# EAGLE board Sparkfun_RS232_Panel_v15 (EAGLE 7.2.0), part 1 of 3
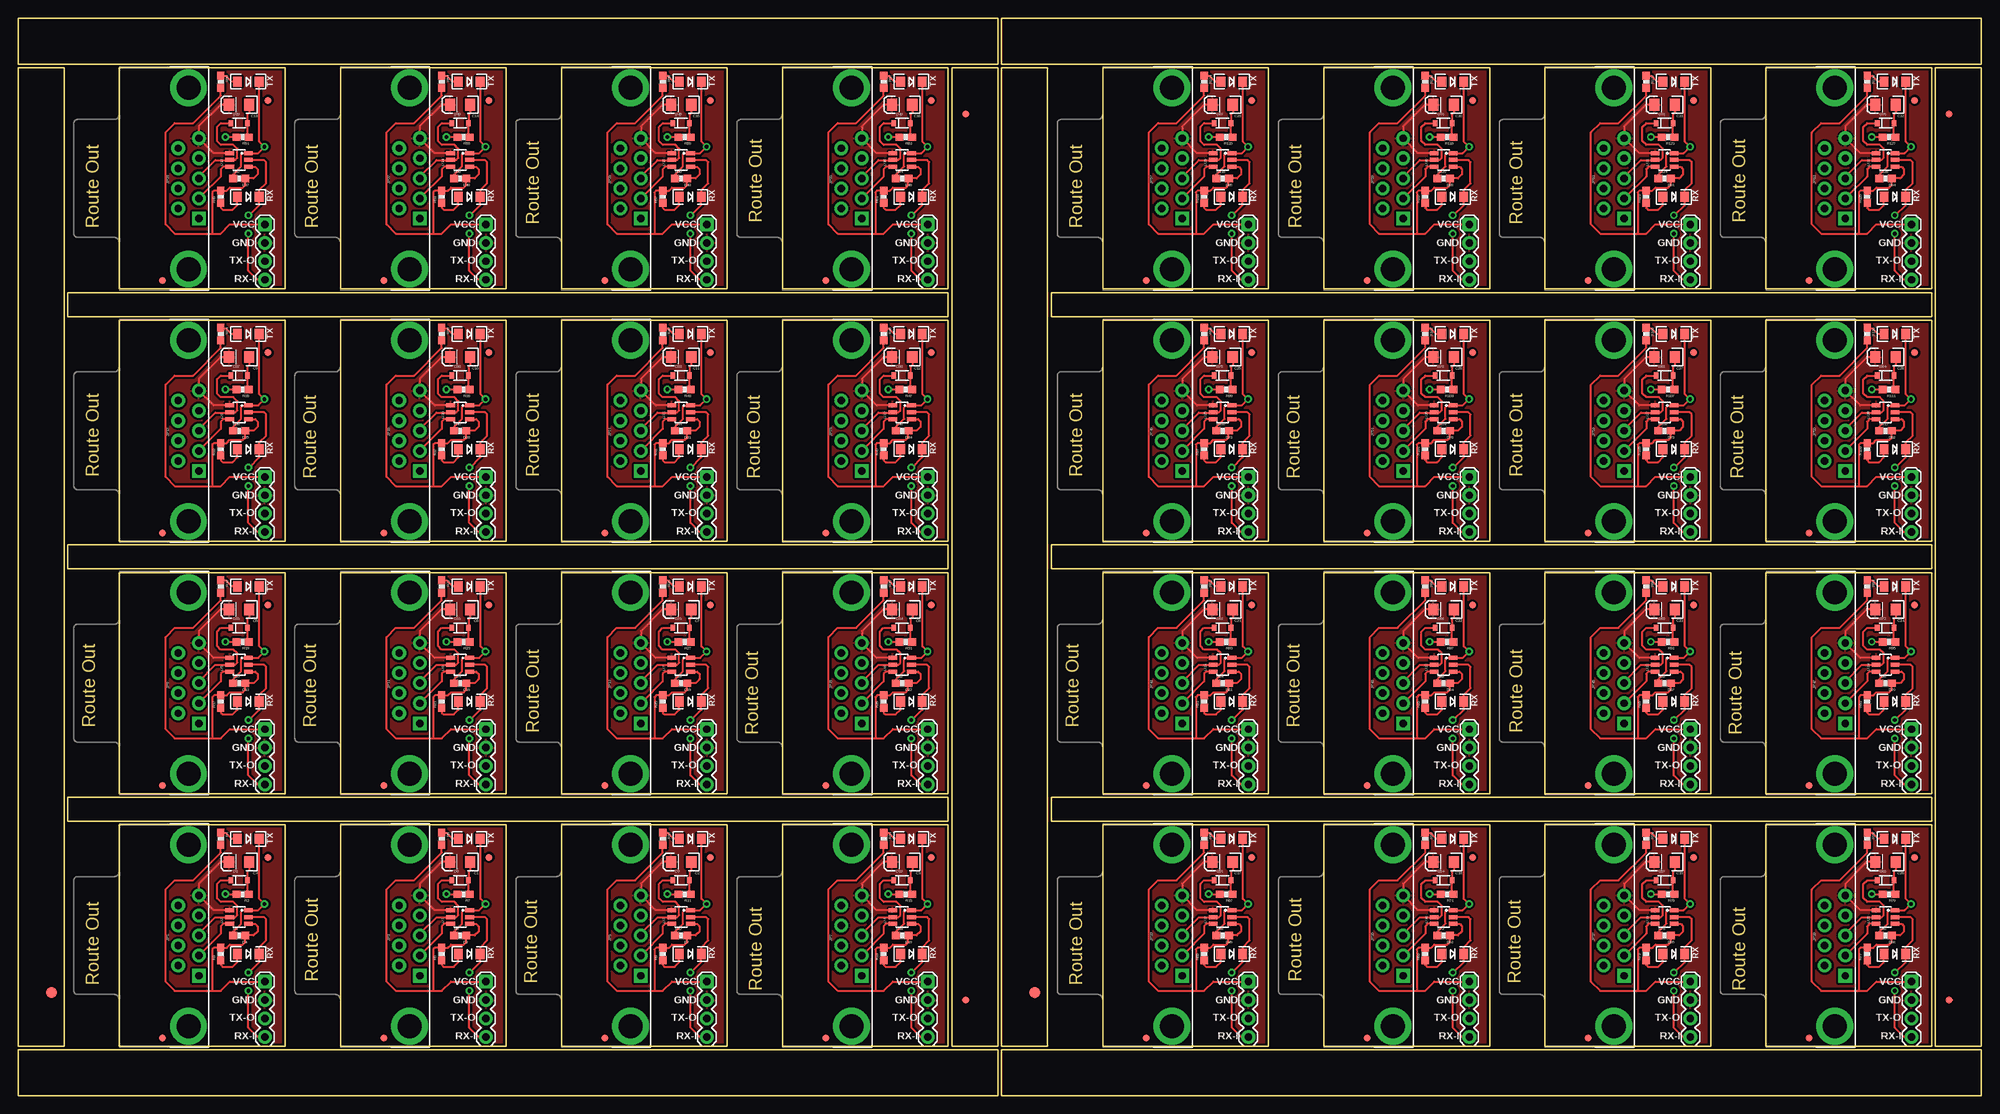
[diagram p0: board, top side]
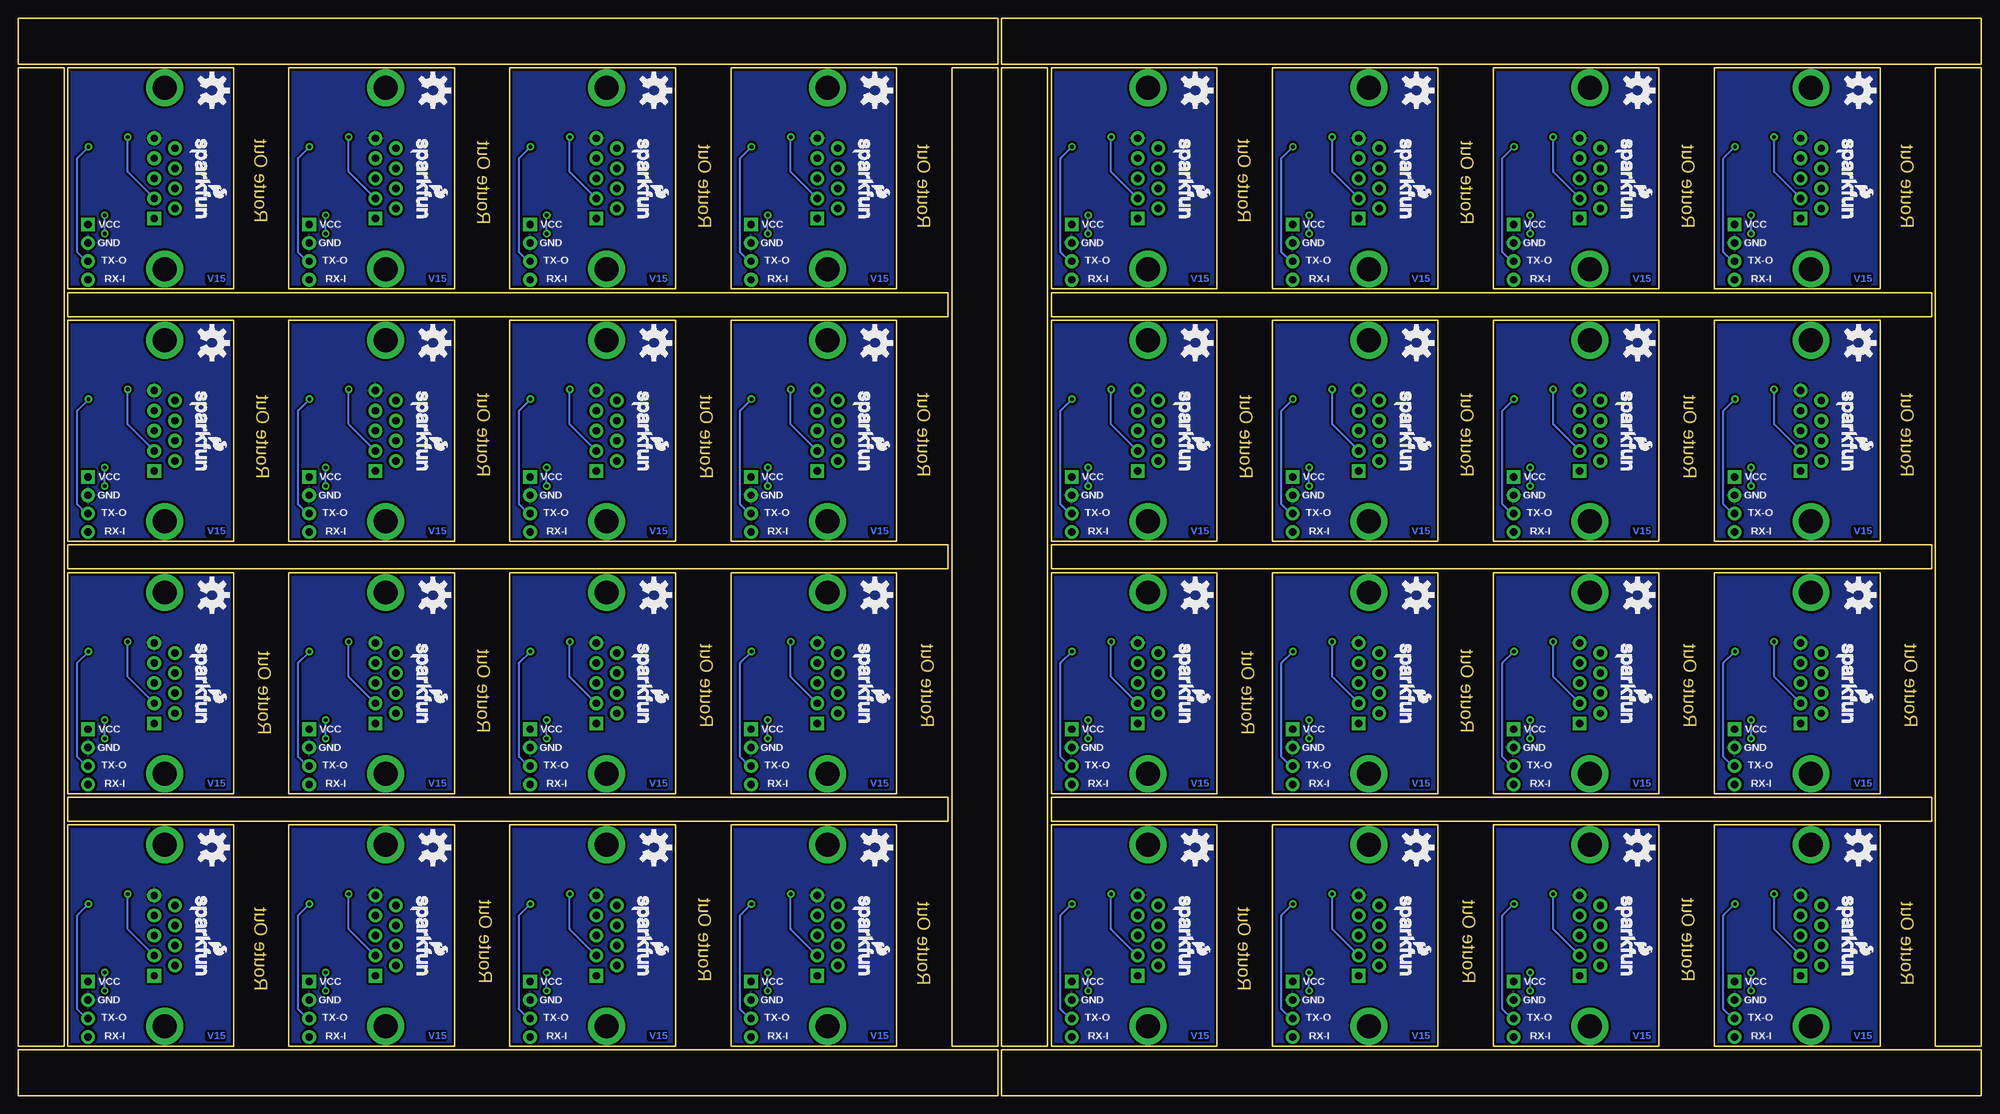
[diagram p1: board, bottom side, seen from below]

Size 270.76 x 148.59 mm. Coordinates in mm from the lower left corner, seen from the top.
Outline: 196 segments
Copper layers (1*16): Top 0.035mm / dielectric 1.5mm / Bottom 0.035mm
Design rules "SparkFun-2-layer": minimum track width 7mil, minimum drill 15mil, track to track 8mil, track to pad 8mil, pad to pad 8mil, via to via 8mil, smd to smd 8mil, copper to edge 8mil, drill to drill 8mil, minimum pad ring 12mil, minimum via ring 10mil, stop-mask expansion 4mil, vias tented up to drill 20mil, thermal gap 10mil
Net classes: 0 default: width 0.203 mm; 1 power: width 0.203 mm

## Footprints (pad centres in the part's own frame; a part is rotated, then mirrored left to right if it is on the bottom)
EIA3216 = smd 1.4 x 1.6: A 1.4,0; C -1.4,0
SOD-323 = smd 0.63 x 0.83: A 1.15,0; C -1.15,0
LED-1206 = smd 1.2 x 1.4: A -1.5,0; C 1.5,0
FIDUCIAL-1X2 = smd 1 x 1: 1 0,0
FIDUCIAL-1.5X3 = smd 1.5 x 1.5: 1 0,0
DB9 = drill 1.016 pad 1.88 square: 1 -5.54,-1.42 | drill 1.016 pad 1.88: 2 -2.77,-1.42; 3 0,-1.42; 4 2.77,-1.42; 5 5.54,-1.42; 6 -4.15,1.42; 7 -1.38,1.42; 8 1.38,1.42; 9 4.15,1.42 | drill 3.302 pad 5.08: G1 -12.5,0; G2 12.5,0
1X04 = drill 1.016 pad 1.88 square: 1 0,0 | drill 1.016 pad 1.88: 2 2.54,0; 3 5.08,0; 4 7.62,0
0603-RES = smd 1.1 x 1: 1 -0.85,0; 2 0.85,0
SOT23-6 = smd 0.55 x 1.2: 1 0.95,-1.3; 2 0,-1.3; 3 -0.95,-1.3; 4 -0.95,1.3; 5 0,1.3; 6 0.95,1.3

## Placement (x,y rotation side)
C1  10uF  [EIA3216]  60.96,32.26 180 top
C2  10uF  [EIA3216]  91.44,32.26 180 top
C3  10uF  [EIA3216]  121.92,32.26 180 top
C4  10uF  [EIA3216]  30.48,32.26 180 top
C5  10uF  [EIA3216]  30.48,67.06 180 top
C6  10uF  [EIA3216]  60.96,67.06 180 top
C7  10uF  [EIA3216]  91.44,67.06 180 top
C8  10uF  [EIA3216]  121.92,67.06 180 top
C9  10uF  [EIA3216]  30.48,101.85 180 top
C10  10uF  [EIA3216]  60.96,101.85 180 top
C11  10uF  [EIA3216]  91.44,101.85 180 top
C12  10uF  [EIA3216]  121.92,101.85 180 top
C13  10uF  [EIA3216]  30.48,136.65 180 top
C14  10uF  [EIA3216]  60.96,136.65 180 top
C15  10uF  [EIA3216]  91.44,136.65 180 top
C16  10uF  [EIA3216]  121.92,136.65 180 top
C17  10uF  [EIA3216]  166.12,32.26 180 top
C18  10uF  [EIA3216]  196.6,32.26 180 top
C19  10uF  [EIA3216]  227.08,32.26 180 top
C20  10uF  [EIA3216]  257.56,32.26 180 top
C21  10uF  [EIA3216]  166.12,67.06 180 top
C22  10uF  [EIA3216]  196.6,67.06 180 top
C23  10uF  [EIA3216]  227.08,67.06 180 top
C24  10uF  [EIA3216]  257.56,67.06 180 top
C25  10uF  [EIA3216]  166.12,101.85 180 top
C26  10uF  [EIA3216]  196.6,101.85 180 top
C27  10uF  [EIA3216]  227.08,101.85 180 top
C28  10uF  [EIA3216]  257.56,101.85 180 top
C29  10uF  [EIA3216]  166.12,136.65 180 top
C30  10uF  [EIA3216]  196.6,136.65 180 top
C31  10uF  [EIA3216]  227.08,136.65 180 top
C32  10uF  [EIA3216]  257.56,136.65 180 top
D1  BAS16  [SOD-323]  30.48,29.72 0 top
D2  Red  [LED-1206]  62.23,19.56 0 top
D3  Grn  [LED-1206]  62.23,35.43 0 top
D4  Red  [LED-1206]  31.75,19.56 0 top
D5  Grn  [LED-1206]  31.75,35.43 0 top
D6  BAS16  [SOD-323]  60.96,29.72 0 top
D7  Red  [LED-1206]  92.71,19.56 0 top
D8  Grn  [LED-1206]  92.71,35.43 0 top
D9  BAS16  [SOD-323]  91.44,29.72 0 top
D10  Red  [LED-1206]  123.19,19.56 0 top
D11  Grn  [LED-1206]  123.19,35.43 0 top
D12  BAS16  [SOD-323]  121.92,29.72 0 top
D13  Red  [LED-1206]  31.75,54.36 0 top
D14  Grn  [LED-1206]  31.75,70.23 0 top
D15  BAS16  [SOD-323]  30.48,64.52 0 top
D16  Red  [LED-1206]  62.23,54.36 0 top
D17  Grn  [LED-1206]  62.23,70.23 0 top
D18  BAS16  [SOD-323]  60.96,64.52 0 top
D19  Red  [LED-1206]  92.71,54.36 0 top
D20  Grn  [LED-1206]  92.71,70.23 0 top
D21  BAS16  [SOD-323]  91.44,64.52 0 top
D22  Red  [LED-1206]  123.19,54.36 0 top
D23  Grn  [LED-1206]  123.19,70.23 0 top
D24  BAS16  [SOD-323]  121.92,64.52 0 top
D25  Red  [LED-1206]  31.75,89.15 0 top
D26  Grn  [LED-1206]  31.75,105.03 0 top
D27  BAS16  [SOD-323]  30.48,99.31 0 top
D28  Red  [LED-1206]  62.23,89.15 0 top
D29  Grn  [LED-1206]  62.23,105.03 0 top
D30  BAS16  [SOD-323]  60.96,99.31 0 top
D31  Red  [LED-1206]  92.71,89.15 0 top
D32  Grn  [LED-1206]  92.71,105.03 0 top
D33  BAS16  [SOD-323]  91.44,99.31 0 top
D34  Red  [LED-1206]  123.19,89.15 0 top
D35  Grn  [LED-1206]  123.19,105.03 0 top
D36  BAS16  [SOD-323]  121.92,99.31 0 top
D37  Red  [LED-1206]  31.75,123.95 0 top
D38  Grn  [LED-1206]  31.75,139.83 0 top
D39  BAS16  [SOD-323]  30.48,134.11 0 top
D40  Red  [LED-1206]  62.23,123.95 0 top
D41  Grn  [LED-1206]  62.23,139.83 0 top
D42  BAS16  [SOD-323]  60.96,134.11 0 top
D43  Red  [LED-1206]  92.71,123.95 0 top
D44  Grn  [LED-1206]  92.71,139.83 0 top
D45  BAS16  [SOD-323]  91.44,134.11 0 top
D46  Red  [LED-1206]  123.19,123.95 0 top
D47  Grn  [LED-1206]  123.19,139.83 0 top
D48  BAS16  [SOD-323]  121.92,134.11 0 top
D49  Red  [LED-1206]  167.39,19.56 0 top
D50  Grn  [LED-1206]  167.39,35.43 0 top
D51  BAS16  [SOD-323]  166.12,29.72 0 top
D52  Red  [LED-1206]  197.87,19.56 0 top
D53  Grn  [LED-1206]  197.87,35.43 0 top
D54  BAS16  [SOD-323]  196.6,29.72 0 top
D55  Red  [LED-1206]  228.35,19.56 0 top
D56  Grn  [LED-1206]  228.35,35.43 0 top
D57  BAS16  [SOD-323]  227.08,29.72 0 top
D58  Red  [LED-1206]  258.83,19.56 0 top
D59  Grn  [LED-1206]  258.83,35.43 0 top
D60  BAS16  [SOD-323]  257.56,29.72 0 top
D61  Red  [LED-1206]  167.39,54.36 0 top
D62  Grn  [LED-1206]  167.39,70.23 0 top
D63  BAS16  [SOD-323]  166.12,64.52 0 top
D64  Red  [LED-1206]  197.87,54.36 0 top
D65  Grn  [LED-1206]  197.87,70.23 0 top
D66  BAS16  [SOD-323]  196.6,64.52 0 top
D67  Red  [LED-1206]  228.35,54.36 0 top
D68  Grn  [LED-1206]  228.35,70.23 0 top
D69  BAS16  [SOD-323]  227.08,64.52 0 top
D70  Red  [LED-1206]  258.83,54.36 0 top
D71  Grn  [LED-1206]  258.83,70.23 0 top
D72  BAS16  [SOD-323]  257.56,64.52 0 top
D73  Red  [LED-1206]  167.39,89.15 0 top
D74  Grn  [LED-1206]  167.39,105.03 0 top
D75  BAS16  [SOD-323]  166.12,99.31 0 top
D76  Red  [LED-1206]  197.87,89.15 0 top
D77  Grn  [LED-1206]  197.87,105.03 0 top
D78  BAS16  [SOD-323]  196.6,99.31 0 top
D79  Red  [LED-1206]  228.35,89.15 0 top
D80  Grn  [LED-1206]  228.35,105.03 0 top
D81  BAS16  [SOD-323]  227.08,99.31 0 top
D82  Red  [LED-1206]  258.83,89.15 0 top
D83  Grn  [LED-1206]  258.83,105.03 0 top
D84  BAS16  [SOD-323]  257.56,99.31 0 top
D85  Red  [LED-1206]  167.39,123.95 0 top
D86  Grn  [LED-1206]  167.39,139.83 0 top
D87  BAS16  [SOD-323]  166.12,134.11 0 top
D88  Red  [LED-1206]  197.87,123.95 0 top
D89  Grn  [LED-1206]  197.87,139.83 0 top
D90  BAS16  [SOD-323]  196.6,134.11 0 top
D91  Red  [LED-1206]  228.35,123.95 0 top
D92  Grn  [LED-1206]  228.35,139.83 0 top
D93  BAS16  [SOD-323]  227.08,134.11 0 top
D94  Red  [LED-1206]  258.83,123.95 0 top
D95  Grn  [LED-1206]  258.83,139.83 0 top
D96  BAS16  [SOD-323]  257.56,134.11 0 top
E$1  FIDUCIAL1X2  [FIDUCIAL-1X2]  19.94,8 0 top
E$2  FIDUCIAL1X2  [FIDUCIAL-1X2]  34.48,32.87 0 top
E$3  FIDUCIAL1X2  [FIDUCIAL-1X2]  50.42,8 0 top
E$4  FIDUCIAL1X2  [FIDUCIAL-1X2]  64.96,32.87 0 top
E$5  FIDUCIAL1X2  [FIDUCIAL-1X2]  80.9,8 0 top
E$6  FIDUCIAL1X2  [FIDUCIAL-1X2]  95.44,32.87 0 top
E$7  FIDUCIAL1X2  [FIDUCIAL-1X2]  111.38,8 0 top
E$8  FIDUCIAL1X2  [FIDUCIAL-1X2]  125.92,32.87 0 top
E$9  FIDUCIAL1X2  [FIDUCIAL-1X2]  19.94,42.8 0 top
E$10  FIDUCIAL1X2  [FIDUCIAL-1X2]  34.48,67.66 0 top
E$11  FIDUCIAL1X2  [FIDUCIAL-1X2]  50.42,42.8 0 top
E$12  FIDUCIAL1X2  [FIDUCIAL-1X2]  64.96,67.66 0 top
E$13  FIDUCIAL1X2  [FIDUCIAL-1X2]  80.9,42.8 0 top
E$14  FIDUCIAL1X2  [FIDUCIAL-1X2]  95.44,67.66 0 top
E$15  FIDUCIAL1X2  [FIDUCIAL-1X2]  111.38,42.8 0 top
E$16  FIDUCIAL1X2  [FIDUCIAL-1X2]  125.92,67.66 0 top
E$17  FIDUCIAL1X2  [FIDUCIAL-1X2]  19.94,77.6 0 top
E$18  FIDUCIAL1X2  [FIDUCIAL-1X2]  34.48,102.46 0 top
E$19  FIDUCIAL1X2  [FIDUCIAL-1X2]  50.42,77.6 0 top
E$20  FIDUCIAL1X2  [FIDUCIAL-1X2]  64.96,102.46 0 top
E$21  FIDUCIAL1X2  [FIDUCIAL-1X2]  80.9,77.6 0 top
E$22  FIDUCIAL1X2  [FIDUCIAL-1X2]  95.44,102.46 0 top
E$23  FIDUCIAL1X2  [FIDUCIAL-1X2]  111.38,77.6 0 top
E$24  FIDUCIAL1X2  [FIDUCIAL-1X2]  125.92,102.46 0 top
E$25  FIDUCIAL1X2  [FIDUCIAL-1X2]  19.94,112.39 0 top
E$26  FIDUCIAL1X2  [FIDUCIAL-1X2]  34.48,137.26 0 top
E$27  FIDUCIAL1X2  [FIDUCIAL-1X2]  50.42,112.39 0 top
E$28  FIDUCIAL1X2  [FIDUCIAL-1X2]  64.96,137.26 0 top
E$29  FIDUCIAL1X2  [FIDUCIAL-1X2]  80.9,112.39 0 top
E$30  FIDUCIAL1X2  [FIDUCIAL-1X2]  95.44,137.26 0 top
E$31  FIDUCIAL1X2  [FIDUCIAL-1X2]  111.38,112.39 0 top
E$32  FIDUCIAL1X2  [FIDUCIAL-1X2]  125.92,137.26 0 top
E$33  [FIDUCIAL-1.5X3]  4.57,14.22 0 top
E$34  FIDUCIAL1X2  [FIDUCIAL-1X2]  155.57,8 0 top
E$35  FIDUCIAL1X2  [FIDUCIAL-1X2]  170.11,32.87 0 top
E$36  FIDUCIAL1X2  [FIDUCIAL-1X2]  186.06,8 0 top
E$37  FIDUCIAL1X2  [FIDUCIAL-1X2]  200.59,32.87 0 top
E$38  FIDUCIAL1X2  [FIDUCIAL-1X2]  216.53,8 0 top
E$39  FIDUCIAL1X2  [FIDUCIAL-1X2]  231.07,32.87 0 top
E$40  FIDUCIAL1X2  [FIDUCIAL-1X2]  247.01,8 0 top
E$41  FIDUCIAL1X2  [FIDUCIAL-1X2]  261.55,32.87 0 top
E$42  [FIDUCIAL-1X2]  130.68,13.21 0 top
E$43  [FIDUCIAL-1X2]  130.68,135.38 180 top
E$44  FIDUCIAL1X2  [FIDUCIAL-1X2]  155.57,42.8 0 top
E$45  FIDUCIAL1X2  [FIDUCIAL-1X2]  170.11,67.66 0 top
E$46  FIDUCIAL1X2  [FIDUCIAL-1X2]  186.06,42.8 0 top
E$47  FIDUCIAL1X2  [FIDUCIAL-1X2]  200.59,67.66 0 top
E$48  FIDUCIAL1X2  [FIDUCIAL-1X2]  216.53,42.8 0 top
E$49  FIDUCIAL1X2  [FIDUCIAL-1X2]  231.07,67.66 0 top
E$50  FIDUCIAL1X2  [FIDUCIAL-1X2]  247.01,42.8 0 top
E$51  FIDUCIAL1X2  [FIDUCIAL-1X2]  261.55,67.66 0 top
E$52  FIDUCIAL1X2  [FIDUCIAL-1X2]  155.57,77.6 0 top
E$53  FIDUCIAL1X2  [FIDUCIAL-1X2]  170.11,102.46 0 top
E$54  FIDUCIAL1X2  [FIDUCIAL-1X2]  186.06,77.6 0 top
E$55  FIDUCIAL1X2  [FIDUCIAL-1X2]  200.59,102.46 0 top
E$56  FIDUCIAL1X2  [FIDUCIAL-1X2]  216.53,77.6 0 top
E$57  FIDUCIAL1X2  [FIDUCIAL-1X2]  231.07,102.46 0 top
E$58  FIDUCIAL1X2  [FIDUCIAL-1X2]  247.01,77.6 0 top
E$59  FIDUCIAL1X2  [FIDUCIAL-1X2]  261.55,102.46 0 top
E$60  FIDUCIAL1X2  [FIDUCIAL-1X2]  155.57,112.39 0 top
E$61  FIDUCIAL1X2  [FIDUCIAL-1X2]  170.11,137.26 0 top
E$62  FIDUCIAL1X2  [FIDUCIAL-1X2]  186.06,112.39 0 top
E$63  FIDUCIAL1X2  [FIDUCIAL-1X2]  200.59,137.26 0 top
E$64  FIDUCIAL1X2  [FIDUCIAL-1X2]  216.53,112.39 0 top
E$65  FIDUCIAL1X2  [FIDUCIAL-1X2]  231.07,137.26 0 top
E$66  FIDUCIAL1X2  [FIDUCIAL-1X2]  247.01,112.39 0 top
E$67  FIDUCIAL1X2  [FIDUCIAL-1X2]  261.55,137.26 0 top
E$68  [FIDUCIAL-1X2]  266.32,13.21 0 top
E$69  [FIDUCIAL-1X2]  266.32,135.38 180 top
E$70  [FIDUCIAL-1.5X3]  140.21,14.22 0 top
JP1  DB9  [DB9]  23.5,22.1 90 top
JP2  [1X04]  34.04,15.75 270 top
JP3  DB9  [DB9]  53.98,22.1 90 top
JP4  [1X04]  64.52,15.75 270 top
JP5  DB9  [DB9]  84.45,22.1 90 top
JP6  [1X04]  95,15.75 270 top
JP7  DB9  [DB9]  114.94,22.1 90 top
JP8  [1X04]  125.48,15.75 270 top
JP9  DB9  [DB9]  23.5,56.9 90 top
JP10  [1X04]  34.04,50.55 270 top
JP11  DB9  [DB9]  53.98,56.9 90 top
JP12  [1X04]  64.52,50.55 270 top
JP13  DB9  [DB9]  84.45,56.9 90 top
JP14  [1X04]  95,50.55 270 top
JP15  DB9  [DB9]  114.94,56.9 90 top
JP16  [1X04]  125.48,50.55 270 top
JP17  DB9  [DB9]  23.5,91.69 90 top
JP18  [1X04]  34.04,85.34 270 top
JP19  DB9  [DB9]  53.98,91.69 90 top
JP20  [1X04]  64.52,85.34 270 top
JP21  DB9  [DB9]  84.45,91.69 90 top
JP22  [1X04]  95,85.34 270 top
JP23  DB9  [DB9]  114.94,91.69 90 top
JP24  [1X04]  125.48,85.34 270 top
JP25  DB9  [DB9]  23.5,126.49 90 top
JP26  [1X04]  34.04,120.14 270 top
JP27  DB9  [DB9]  53.98,126.49 90 top
JP28  [1X04]  64.52,120.14 270 top
JP29  DB9  [DB9]  84.45,126.49 90 top
JP30  [1X04]  95,120.14 270 top
JP31  DB9  [DB9]  114.94,126.49 90 top
JP32  [1X04]  125.48,120.14 270 top
JP33  DB9  [DB9]  159.13,22.1 90 top
JP34  [1X04]  169.67,15.75 270 top
JP35  DB9  [DB9]  189.61,22.1 90 top
JP36  [1X04]  200.15,15.75 270 top
JP37  DB9  [DB9]  220.09,22.1 90 top
JP38  [1X04]  230.63,15.75 270 top
JP39  DB9  [DB9]  250.57,22.1 90 top
JP40  [1X04]  261.11,15.75 270 top
JP41  DB9  [DB9]  159.13,56.9 90 top
JP42  [1X04]  169.67,50.55 270 top
JP43  DB9  [DB9]  189.61,56.9 90 top
JP44  [1X04]  200.15,50.55 270 top
JP45  DB9  [DB9]  220.09,56.9 90 top
JP46  [1X04]  230.63,50.55 270 top
JP47  DB9  [DB9]  250.57,56.9 90 top
JP48  [1X04]  261.11,50.55 270 top
JP49  DB9  [DB9]  159.13,91.69 90 top
JP50  [1X04]  169.67,85.34 270 top
JP51  DB9  [DB9]  189.61,91.69 90 top
JP52  [1X04]  200.15,85.34 270 top
JP53  DB9  [DB9]  220.09,91.69 90 top
JP54  [1X04]  230.63,85.34 270 top
JP55  DB9  [DB9]  250.57,91.69 90 top
JP56  [1X04]  261.11,85.34 270 top
JP57  DB9  [DB9]  159.13,126.49 90 top
JP58  [1X04]  169.67,120.14 270 top
JP59  DB9  [DB9]  189.61,126.49 90 top
JP60  [1X04]  200.15,120.14 270 top
JP61  DB9  [DB9]  220.09,126.49 90 top
JP62  [1X04]  230.63,120.14 270 top
JP63  DB9  [DB9]  250.57,126.49 90 top
JP64  [1X04]  261.11,120.14 270 top
LOGO1  SFE_LOGO_NAME_FLAME.1_INCH  [SFE_LOGO_NAME_FLAME_.1]  20.1,27.97 270 bottom
LOGO2  OSHW-LOGOM  [OSHW-LOGO-M]  16.96,34.23 270 bottom
LOGO3  OSHW-LOGOM  [OSHW-LOGO-M]  47.44,34.23 270 bottom
LOGO4  SFE_LOGO_NAME_FLAME.1_INCH  [SFE_LOGO_NAME_FLAME_.1]  50.58,27.97 270 bottom
LOGO5  OSHW-LOGOM  [OSHW-LOGO-M]  77.92,34.23 270 bottom
LOGO6  SFE_LOGO_NAME_FLAME.1_INCH  [SFE_LOGO_NAME_FLAME_.1]  81.06,27.97 270 bottom
LOGO7  OSHW-LOGOM  [OSHW-LOGO-M]  108.4,34.23 270 bottom
LOGO8  SFE_LOGO_NAME_FLAME.1_INCH  [SFE_LOGO_NAME_FLAME_.1]  111.54,27.97 270 bottom
LOGO9  OSHW-LOGOM  [OSHW-LOGO-M]  16.96,69.02 270 bottom
LOGO10  SFE_LOGO_NAME_FLAME.1_INCH  [SFE_LOGO_NAME_FLAME_.1]  20.1,62.76 270 bottom
LOGO11  OSHW-LOGOM  [OSHW-LOGO-M]  47.44,69.02 270 bottom
LOGO12  SFE_LOGO_NAME_FLAME.1_INCH  [SFE_LOGO_NAME_FLAME_.1]  50.58,62.76 270 bottom
LOGO13  OSHW-LOGOM  [OSHW-LOGO-M]  77.92,69.02 270 bottom
LOGO14  SFE_LOGO_NAME_FLAME.1_INCH  [SFE_LOGO_NAME_FLAME_.1]  81.06,62.76 270 bottom
LOGO15  OSHW-LOGOM  [OSHW-LOGO-M]  108.4,69.02 270 bottom
LOGO16  SFE_LOGO_NAME_FLAME.1_INCH  [SFE_LOGO_NAME_FLAME_.1]  111.54,62.76 270 bottom
LOGO17  OSHW-LOGOM  [OSHW-LOGO-M]  16.96,103.82 270 bottom
LOGO18  SFE_LOGO_NAME_FLAME.1_INCH  [SFE_LOGO_NAME_FLAME_.1]  20.1,97.56 270 bottom
LOGO19  OSHW-LOGOM  [OSHW-LOGO-M]  47.44,103.82 270 bottom
LOGO20  SFE_LOGO_NAME_FLAME.1_INCH  [SFE_LOGO_NAME_FLAME_.1]  50.58,97.56 270 bottom
LOGO21  OSHW-LOGOM  [OSHW-LOGO-M]  77.92,103.82 270 bottom
LOGO22  SFE_LOGO_NAME_FLAME.1_INCH  [SFE_LOGO_NAME_FLAME_.1]  81.06,97.56 270 bottom
LOGO23  OSHW-LOGOM  [OSHW-LOGO-M]  108.4,103.82 270 bottom
LOGO24  SFE_LOGO_NAME_FLAME.1_INCH  [SFE_LOGO_NAME_FLAME_.1]  111.54,97.56 270 bottom
LOGO25  OSHW-LOGOM  [OSHW-LOGO-M]  16.96,138.62 270 bottom
LOGO26  SFE_LOGO_NAME_FLAME.1_INCH  [SFE_LOGO_NAME_FLAME_.1]  20.1,132.36 270 bottom
LOGO27  OSHW-LOGOM  [OSHW-LOGO-M]  47.44,138.62 270 bottom
LOGO28  SFE_LOGO_NAME_FLAME.1_INCH  [SFE_LOGO_NAME_FLAME_.1]  50.58,132.36 270 bottom
LOGO29  OSHW-LOGOM  [OSHW-LOGO-M]  77.92,138.62 270 bottom
LOGO30  SFE_LOGO_NAME_FLAME.1_INCH  [SFE_LOGO_NAME_FLAME_.1]  81.06,132.36 270 bottom
LOGO31  OSHW-LOGOM  [OSHW-LOGO-M]  108.4,138.62 270 bottom
LOGO32  SFE_LOGO_NAME_FLAME.1_INCH  [SFE_LOGO_NAME_FLAME_.1]  111.54,132.36 270 bottom
LOGO33  OSHW-LOGOM  [OSHW-LOGO-M]  152.6,34.23 270 bottom
LOGO34  SFE_LOGO_NAME_FLAME.1_INCH  [SFE_LOGO_NAME_FLAME_.1]  155.74,27.97 270 bottom
LOGO35  OSHW-LOGOM  [OSHW-LOGO-M]  183.08,34.23 270 bottom
LOGO36  SFE_LOGO_NAME_FLAME.1_INCH  [SFE_LOGO_NAME_FLAME_.1]  186.22,27.97 270 bottom
LOGO37  OSHW-LOGOM  [OSHW-LOGO-M]  213.56,34.23 270 bottom
LOGO38  SFE_LOGO_NAME_FLAME.1_INCH  [SFE_LOGO_NAME_FLAME_.1]  216.7,27.97 270 bottom
LOGO39  OSHW-LOGOM  [OSHW-LOGO-M]  244.04,34.23 270 bottom
LOGO40  SFE_LOGO_NAME_FLAME.1_INCH  [SFE_LOGO_NAME_FLAME_.1]  247.18,27.97 270 bottom
LOGO41  OSHW-LOGOM  [OSHW-LOGO-M]  152.6,69.02 270 bottom
LOGO42  SFE_LOGO_NAME_FLAME.1_INCH  [SFE_LOGO_NAME_FLAME_.1]  155.74,62.76 270 bottom
LOGO43  OSHW-LOGOM  [OSHW-LOGO-M]  183.08,69.02 270 bottom
LOGO44  SFE_LOGO_NAME_FLAME.1_INCH  [SFE_LOGO_NAME_FLAME_.1]  186.22,62.76 270 bottom
LOGO45  OSHW-LOGOM  [OSHW-LOGO-M]  213.56,69.02 270 bottom
LOGO46  SFE_LOGO_NAME_FLAME.1_INCH  [SFE_LOGO_NAME_FLAME_.1]  216.7,62.76 270 bottom
LOGO47  OSHW-LOGOM  [OSHW-LOGO-M]  244.04,69.02 270 bottom
LOGO48  SFE_LOGO_NAME_FLAME.1_INCH  [SFE_LOGO_NAME_FLAME_.1]  247.18,62.76 270 bottom
LOGO49  OSHW-LOGOM  [OSHW-LOGO-M]  152.6,103.82 270 bottom
LOGO50  SFE_LOGO_NAME_FLAME.1_INCH  [SFE_LOGO_NAME_FLAME_.1]  155.74,97.56 270 bottom
LOGO51  OSHW-LOGOM  [OSHW-LOGO-M]  183.08,103.82 270 bottom
LOGO52  SFE_LOGO_NAME_FLAME.1_INCH  [SFE_LOGO_NAME_FLAME_.1]  186.22,97.56 270 bottom
LOGO53  OSHW-LOGOM  [OSHW-LOGO-M]  213.56,103.82 270 bottom
LOGO54  SFE_LOGO_NAME_FLAME.1_INCH  [SFE_LOGO_NAME_FLAME_.1]  216.7,97.56 270 bottom
LOGO55  OSHW-LOGOM  [OSHW-LOGO-M]  244.04,103.82 270 bottom
LOGO56  SFE_LOGO_NAME_FLAME.1_INCH  [SFE_LOGO_NAME_FLAME_.1]  247.18,97.56 270 bottom
LOGO57  OSHW-LOGOM  [OSHW-LOGO-M]  152.6,138.62 270 bottom
LOGO58  SFE_LOGO_NAME_FLAME.1_INCH  [SFE_LOGO_NAME_FLAME_.1]  155.74,132.36 270 bottom
LOGO59  OSHW-LOGOM  [OSHW-LOGO-M]  183.08,138.62 270 bottom
LOGO60  SFE_LOGO_NAME_FLAME.1_INCH  [SFE_LOGO_NAME_FLAME_.1]  186.22,132.36 270 bottom
LOGO61  OSHW-LOGOM  [OSHW-LOGO-M]  213.56,138.62 270 bottom
LOGO62  SFE_LOGO_NAME_FLAME.1_INCH  [SFE_LOGO_NAME_FLAME_.1]  216.7,132.36 270 bottom
LOGO63  OSHW-LOGOM  [OSHW-LOGO-M]  244.04,138.62 270 bottom
LOGO64  SFE_LOGO_NAME_FLAME.1_INCH  [SFE_LOGO_NAME_FLAME_.1]  247.18,132.36 270 bottom
R1  10K  [0603-RES]  30.48,22.1 0 top
R2  10K  [0603-RES]  30.97,27.78 180 top
R3  330  [0603-RES]  27.94,19.56 90 top
R4  330  [0603-RES]  27.94,35.43 270 top
R5  330  [0603-RES]  58.42,19.56 90 top
R6  330  [0603-RES]  58.42,35.43 270 top
R7  10K  [0603-RES]  61.45,27.78 180 top
R8  10K  [0603-RES]  60.96,22.1 0 top
R9  330  [0603-RES]  88.9,19.56 90 top
R10  330  [0603-RES]  88.9,35.43 270 top
R11  10K  [0603-RES]  91.93,27.78 180 top
R12  10K  [0603-RES]  91.44,22.1 0 top
R13  330  [0603-RES]  119.38,19.56 90 top
R14  330  [0603-RES]  119.38,35.43 270 top
R15  10K  [0603-RES]  122.41,27.78 180 top
R16  10K  [0603-RES]  121.92,22.1 0 top
R17  330  [0603-RES]  27.94,54.36 90 top
R18  330  [0603-RES]  27.94,70.23 270 top
R19  10K  [0603-RES]  30.97,62.58 180 top
R20  10K  [0603-RES]  30.48,56.9 0 top
R21  330  [0603-RES]  58.42,54.36 90 top
R22  330  [0603-RES]  58.42,70.23 270 top
R23  10K  [0603-RES]  61.45,62.58 180 top
R24  10K  [0603-RES]  60.96,56.9 0 top
R25  330  [0603-RES]  88.9,54.36 90 top
R26  330  [0603-RES]  88.9,70.23 270 top
R27  10K  [0603-RES]  91.93,62.58 180 top
R28  10K  [0603-RES]  91.44,56.9 0 top
R29  330  [0603-RES]  119.38,54.36 90 top
R30  330  [0603-RES]  119.38,70.23 270 top
R31  10K  [0603-RES]  122.41,62.58 180 top
R32  10K  [0603-RES]  121.92,56.9 0 top
R33  330  [0603-RES]  27.94,89.15 90 top
R34  330  [0603-RES]  27.94,105.03 270 top
R35  10K  [0603-RES]  30.97,97.38 180 top
R36  10K  [0603-RES]  30.48,91.69 0 top
R37  330  [0603-RES]  58.42,89.15 90 top
R38  330  [0603-RES]  58.42,105.03 270 top
R39  10K  [0603-RES]  61.45,97.38 180 top
R40  10K  [0603-RES]  60.96,91.69 0 top
R41  330  [0603-RES]  88.9,89.15 90 top
R42  330  [0603-RES]  88.9,105.03 270 top
R43  10K  [0603-RES]  91.93,97.38 180 top
R44  10K  [0603-RES]  91.44,91.69 0 top
R45  330  [0603-RES]  119.38,89.15 90 top
R46  330  [0603-RES]  119.38,105.03 270 top
R47  10K  [0603-RES]  122.41,97.38 180 top
R48  10K  [0603-RES]  121.92,91.69 0 top
R49  330  [0603-RES]  27.94,123.95 90 top
R50  330  [0603-RES]  27.94,139.83 270 top
R51  10K  [0603-RES]  30.97,132.18 180 top
R52  10K  [0603-RES]  30.48,126.49 0 top
R53  330  [0603-RES]  58.42,123.95 90 top
R54  330  [0603-RES]  58.42,139.83 270 top
R55  10K  [0603-RES]  61.45,132.18 180 top
R56  10K  [0603-RES]  60.96,126.49 0 top
R57  330  [0603-RES]  88.9,123.95 90 top
R58  330  [0603-RES]  88.9,139.83 270 top
R59  10K  [0603-RES]  91.93,132.18 180 top
R60  10K  [0603-RES]  91.44,126.49 0 top
R61  330  [0603-RES]  119.38,123.95 90 top
R62  330  [0603-RES]  119.38,139.83 270 top
R63  10K  [0603-RES]  122.41,132.18 180 top
R64  10K  [0603-RES]  121.92,126.49 0 top
R65  330  [0603-RES]  163.58,19.56 90 top
R66  330  [0603-RES]  163.58,35.43 270 top
R67  10K  [0603-RES]  166.6,27.78 180 top
R68  10K  [0603-RES]  166.12,22.1 0 top
R69  330  [0603-RES]  194.06,19.56 90 top
R70  330  [0603-RES]  194.06,35.43 270 top
R71  10K  [0603-RES]  197.08,27.78 180 top
R72  10K  [0603-RES]  196.6,22.1 0 top
R73  330  [0603-RES]  224.54,19.56 90 top
R74  330  [0603-RES]  224.54,35.43 270 top
R75  10K  [0603-RES]  227.56,27.78 180 top
R76  10K  [0603-RES]  227.08,22.1 0 top
R77  330  [0603-RES]  255.02,19.56 90 top
R78  330  [0603-RES]  255.02,35.43 270 top
R79  10K  [0603-RES]  258.04,27.78 180 top
R80  10K  [0603-RES]  257.56,22.1 0 top
R81  330  [0603-RES]  163.58,54.36 90 top
R82  330  [0603-RES]  163.58,70.23 270 top
R83  10K  [0603-RES]  166.6,62.58 180 top
R84  10K  [0603-RES]  166.12,56.9 0 top
R85  330  [0603-RES]  194.06,54.36 90 top
R86  330  [0603-RES]  194.06,70.23 270 top
R87  10K  [0603-RES]  197.08,62.58 180 top
R88  10K  [0603-RES]  196.6,56.9 0 top
R89  330  [0603-RES]  224.54,54.36 90 top
R90  330  [0603-RES]  224.54,70.23 270 top
R91  10K  [0603-RES]  227.56,62.58 180 top
R92  10K  [0603-RES]  227.08,56.9 0 top
R93  330  [0603-RES]  255.02,54.36 90 top
R94  330  [0603-RES]  255.02,70.23 270 top
R95  10K  [0603-RES]  258.04,62.58 180 top
R96  10K  [0603-RES]  257.56,56.9 0 top
R97  330  [0603-RES]  163.58,89.15 90 top
R98  330  [0603-RES]  163.58,105.03 270 top
R99  10K  [0603-RES]  166.6,97.38 180 top
R100  10K  [0603-RES]  166.12,91.69 0 top
R101  330  [0603-RES]  194.06,89.15 90 top
R102  330  [0603-RES]  194.06,105.03 270 top
R103  10K  [0603-RES]  197.08,97.38 180 top
R104  10K  [0603-RES]  196.6,91.69 0 top
R105  330  [0603-RES]  224.54,89.15 90 top
R106  330  [0603-RES]  224.54,105.03 270 top
R107  10K  [0603-RES]  227.56,97.38 180 top
R108  10K  [0603-RES]  227.08,91.69 0 top
R109  330  [0603-RES]  255.02,89.15 90 top
R110  330  [0603-RES]  255.02,105.03 270 top
R111  10K  [0603-RES]  258.04,97.38 180 top
R112  10K  [0603-RES]  257.56,91.69 0 top
R113  330  [0603-RES]  163.58,123.95 90 top
R114  330  [0603-RES]  163.58,139.83 270 top
R115  10K  [0603-RES]  166.6,132.18 180 top
R116  10K  [0603-RES]  166.12,126.49 0 top
R117  330  [0603-RES]  194.06,123.95 90 top
R118  330  [0603-RES]  194.06,139.83 270 top
R119  10K  [0603-RES]  197.08,132.18 180 top
R120  10K  [0603-RES]  196.6,126.49 0 top
R121  330  [0603-RES]  224.54,123.95 90 top
R122  330  [0603-RES]  224.54,139.83 270 top
R123  10K  [0603-RES]  227.56,132.18 180 top
R124  10K  [0603-RES]  227.08,126.49 0 top
R125  330  [0603-RES]  255.02,123.95 90 top
R126  330  [0603-RES]  255.02,139.83 270 top
R127  10K  [0603-RES]  258.04,132.18 180 top
R128  10K  [0603-RES]  257.56,126.49 0 top
U1  XN04312  [SOT23-6]  60.96,24.64 90 top
U2  XN04312  [SOT23-6]  30.48,24.64 90 top
U3  XN04312  [SOT23-6]  91.44,24.64 90 top
U4  XN04312  [SOT23-6]  121.92,24.64 90 top
U5  XN04312  [SOT23-6]  30.48,59.44 90 top
U6  XN04312  [SOT23-6]  60.96,59.44 90 top
U7  XN04312  [SOT23-6]  91.44,59.44 90 top
U8  XN04312  [SOT23-6]  121.92,59.44 90 top
U9  XN04312  [SOT23-6]  30.48,94.23 90 top
U10  XN04312  [SOT23-6]  60.96,94.23 90 top
U11  XN04312  [SOT23-6]  91.44,94.23 90 top
U12  XN04312  [SOT23-6]  121.92,94.23 90 top
U13  XN04312  [SOT23-6]  30.48,129.03 90 top
U14  XN04312  [SOT23-6]  60.96,129.03 90 top
U15  XN04312  [SOT23-6]  91.44,129.03 90 top
U16  XN04312  [SOT23-6]  121.92,129.03 90 top
U17  XN04312  [SOT23-6]  166.12,24.64 90 top
U18  XN04312  [SOT23-6]  196.6,24.64 90 top
U19  XN04312  [SOT23-6]  227.08,24.64 90 top
U20  XN04312  [SOT23-6]  257.56,24.64 90 top
U21  XN04312  [SOT23-6]  166.12,59.44 90 top
U22  XN04312  [SOT23-6]  196.6,59.44 90 top
U23  XN04312  [SOT23-6]  227.08,59.44 90 top
U24  XN04312  [SOT23-6]  257.56,59.44 90 top
U25  XN04312  [SOT23-6]  166.12,94.23 90 top
U26  XN04312  [SOT23-6]  196.6,94.23 90 top
U27  XN04312  [SOT23-6]  227.08,94.23 90 top
U28  XN04312  [SOT23-6]  257.56,94.23 90 top
U29  XN04312  [SOT23-6]  166.12,129.03 90 top
U30  XN04312  [SOT23-6]  196.6,129.03 90 top
U31  XN04312  [SOT23-6]  227.08,129.03 90 top
U32  XN04312  [SOT23-6]  257.56,129.03 90 top

## Library data of the parts
C1-C32 = SparkFun-Capacitors; PROD_ID: CAP-00811
D1 D6 D9 D12 D15 D18 D21 D24 D27 D30 D33 D36 D39 D42 D45 D48 D51 D54 D57 D60 D63 D66 D69 D72 D75 D78 D81 D84 D87 D90 D93 D96 = SparkFun-DiscreteSemi; PROD_ID: DIO-09646; VALUE: 250mA/100V
D2 D4 D7 D10 D13 D16 D19 D22 D25 D28 D31 D34 D37 D40 D43 D46 D49 D52 D55 D58 D61 D64 D67 D70 D73 D76 D79 D82 D85 D88 D91 D94 = SparkFun-LED; PROD_ID: DIO-00809; VALUE: RED
D3 D5 D8 D11 D14 D17 D20 D23 D26 D29 D32 D35 D38 D41 D44 D47 D50 D53 D56 D59 D62 D65 D68 D71 D74 D77 D80 D83 D86 D89 D92 D95 = SparkFun-LED; PROD_ID: DIO-00862; VALUE: GREEN
E$1-E$32 E$34-E$41 E$44-E$67 = SparkFun
E$33 E$70 = SparkFun-Retired
E$42 E$43 E$68 E$69 LOGO1-LOGO64 = SparkFun-Aesthetics
JP1 JP3 JP5 JP7 JP9 JP11 JP13 JP15 JP17 JP19 JP21 JP23 JP25 JP27 JP29 JP31 JP33 JP35 JP37 JP39 JP41 JP43 JP45 JP47 JP49 JP51 JP53 JP55 JP57 JP59 JP61 JP63 = SparkFun-Connectors; PROD_ID: CONN-08194
JP2 JP4 JP6 JP8 JP10 JP12 JP14 JP16 JP18 JP20 JP22 JP24 JP26 JP28 JP30 JP32 JP34 JP36 JP38 JP40 JP42 JP44 JP46 JP48 JP50 JP52 JP54 JP56 JP58 JP60 JP62 JP64 = SparkFun-Connectors
R1 R2 R7 R8 R11 R12 R15 R16 R19 R20 R23 R24 R27 R28 R31 R32 R35 R36 R39 R40 R43 R44 R47 R48 R51 R52 R55 R56 R59 R60 R63 R64 R67 R68 R71 R72 R75 R76 R79 R80 R83 R84 R87 R88 R91 R92 R95 R96 R99 R100 R103 R104 R107 R108 R111 R112 R115 R116 R119 R120 R123 R124 R127 R128 = SparkFun-Resistors; PROD_ID: RES-00824
R3-R6 R9 R10 R13 R14 R17 R18 R21 R22 R25 R26 R29 R30 R33 R34 R37 R38 R41 R42 R45 R46 R49 R50 R53 R54 R57 R58 R61 R62 R65 R66 R69 R70 R73 R74 R77 R78 R81 R82 R85 R86 R89 R90 R93 R94 R97 R98 R101 R102 R105 R106 R109 R110 R113 R114 R117 R118 R121 R122 R125 R126 = SparkFun-Resistors; PROD_ID: RES-00818
U1-U32 = SparkFun-DiscreteSemi; PROD_ID: TRANS-00816

## Nets
GND: C4.A JP1.5 JP2.2 U2.6
GND1: C1.A JP3.5 JP4.2 U1.6
GND2: C2.A JP5.5 JP6.2 U3.6
GND3: C3.A JP7.5 JP8.2 U4.6
GND4: C5.A JP9.5 JP10.2 U5.6
GND5: C6.A JP11.5 JP12.2 U6.6
GND6: C7.A JP13.5 JP14.2 U7.6
GND7: C8.A JP15.5 JP16.2 U8.6
GND8: C9.A JP17.5 JP18.2 U9.6
GND9: C10.A JP19.5 JP20.2 U10.6
GND10: C11.A JP21.5 JP22.2 U11.6
GND11: C12.A JP23.5 JP24.2 U12.6
GND12: C13.A JP25.5 JP26.2 U13.6
GND13: C14.A JP27.5 JP28.2 U14.6
GND14: C15.A JP29.5 JP30.2 U15.6
GND15: C16.A JP31.5 JP32.2 U16.6
GND16: C17.A JP33.5 JP34.2 U17.6
GND17: C18.A JP35.5 JP36.2 U18.6
GND18: C19.A JP37.5 JP38.2 U19.6
GND19: C20.A JP39.5 JP40.2 U20.6
GND20: C21.A JP41.5 JP42.2 U21.6
GND21: C22.A JP43.5 JP44.2 U22.6
GND22: C23.A JP45.5 JP46.2 U23.6
GND23: C24.A JP47.5 JP48.2 U24.6
GND24: C25.A JP49.5 JP50.2 U25.6
GND25: C26.A JP51.5 JP52.2 U26.6
GND26: C27.A JP53.5 JP54.2 U27.6
GND27: C28.A JP55.5 JP56.2 U28.6
GND28: C29.A JP57.5 JP58.2 U29.6
GND29: C30.A JP59.5 JP60.2 U30.6
GND30: C31.A JP61.5 JP62.2 U31.6
GND31: C32.A JP63.5 JP64.2 U32.6
N$1: D4.A R3.1
N$2: D5.A R4.1
N$3: D2.A R5.1
N$4: C4.C D1.A R2.1
N$5: D3.A R6.1
N$6: C1.C D6.A R7.1
N$7: D7.A R9.1
N$8: D8.A R10.1
N$9: C2.C D9.A R11.1
N$10: D10.A R13.1
N$11: D11.A R14.1
N$12: C3.C D12.A R15.1
N$13: D13.A R17.1
N$14: D14.A R18.1
N$15: C5.C D15.A R19.1
N$16: D16.A R21.1
N$17: D17.A R22.1
N$18: C6.C D18.A R23.1
N$19: D19.A R25.1
N$20: D20.A R26.1
N$21: C7.C D21.A R27.1
N$22: D22.A R29.1
N$23: D23.A R30.1
N$24: C8.C D24.A R31.1
N$25: D25.A R33.1
N$26: D26.A R34.1
N$27: C9.C D27.A R35.1
N$28: D28.A R37.1
N$29: D29.A R38.1
N$30: C10.C D30.A R39.1
N$31: D31.A R41.1
N$32: D32.A R42.1
N$33: C11.C D33.A R43.1
N$34: D34.A R45.1
N$35: D35.A R46.1
N$36: C12.C D36.A R47.1
N$37: D37.A R49.1
N$38: D38.A R50.1
N$39: C13.C D39.A R51.1
N$40: D40.A R53.1
N$41: D41.A R54.1
N$42: C14.C D42.A R55.1
N$43: D43.A R57.1
N$44: D44.A R58.1
N$45: C15.C D45.A R59.1
N$46: D46.A R61.1
N$47: D47.A R62.1
N$48: C16.C D48.A R63.1
N$49: D49.A R65.1
N$50: D50.A R66.1
N$51: C17.C D51.A R67.1
N$52: D52.A R69.1
N$53: D53.A R70.1
N$54: C18.C D54.A R71.1
N$55: D55.A R73.1
N$56: D56.A R74.1
N$57: C19.C D57.A R75.1
N$58: D58.A R77.1
N$59: D59.A R78.1
N$60: C20.C D60.A R79.1
N$61: D61.A R81.1
N$62: D62.A R82.1
N$63: C21.C D63.A R83.1
N$64: D64.A R85.1
N$65: D65.A R86.1
N$66: C22.C D66.A R87.1
N$67: D67.A R89.1
N$68: D68.A R90.1
N$69: C23.C D69.A R91.1
N$70: D70.A R93.1
N$71: D71.A R94.1
N$72: C24.C D72.A R95.1
N$73: D73.A R97.1
N$74: D74.A R98.1
N$75: C25.C D75.A R99.1
N$76: D76.A R101.1
N$77: D77.A R102.1
N$78: C26.C D78.A R103.1
N$79: D79.A R105.1
N$80: D80.A R106.1
N$81: C27.C D81.A R107.1
N$82: D82.A R109.1
N$83: D83.A R110.1
N$84: C28.C D84.A R111.1
N$85: D85.A R113.1
N$86: D86.A R114.1
N$87: C29.C D87.A R115.1
N$88: D88.A R117.1
N$89: D89.A R118.1
N$90: C30.C D90.A R119.1
N$91: D91.A R121.1
N$92: D92.A R122.1
N$93: C31.C D93.A R123.1
N$94: D94.A R125.1
N$95: D95.A R126.1
N$96: C32.C D96.A R127.1
RS-IN: D1.C JP1.3 U2.5
RS-IN1: D6.C JP3.3 U1.5
RS-IN2: D9.C JP5.3 U3.5
RS-IN3: D12.C JP7.3 U4.5
RS-IN4: D15.C JP9.3 U5.5
RS-IN5: D18.C JP11.3 U6.5
RS-IN6: D21.C JP13.3 U7.5
RS-IN7: D24.C JP15.3 U8.5
RS-IN8: D27.C JP17.3 U9.5
RS-IN9: D30.C JP19.3 U10.5
RS-IN10: D33.C JP21.3 U11.5
RS-IN11: D36.C JP23.3 U12.5
RS-IN12: D39.C JP25.3 U13.5
RS-IN13: D42.C JP27.3 U14.5
RS-IN14: D45.C JP29.3 U15.5
RS-IN15: D48.C JP31.3 U16.5
RS-IN16: D51.C JP33.3 U17.5
RS-IN17: D54.C JP35.3 U18.5
RS-IN18: D57.C JP37.3 U19.5
RS-IN19: D60.C JP39.3 U20.5
RS-IN20: D63.C JP41.3 U21.5
RS-IN21: D66.C JP43.3 U22.5
RS-IN22: D69.C JP45.3 U23.5
RS-IN23: D72.C JP47.3 U24.5
RS-IN24: D75.C JP49.3 U25.5
RS-IN25: D78.C JP51.3 U26.5
RS-IN26: D81.C JP53.3 U27.5
RS-IN27: D84.C JP55.3 U28.5
RS-IN28: D87.C JP57.3 U29.5
RS-IN29: D90.C JP59.3 U30.5
RS-IN30: D93.C JP61.3 U31.5
RS-IN31: D96.C JP63.3 U32.5
RS-OUT: JP1.2 R2.2 U2.4
RS-OUT1: JP3.2 R7.2 U1.4
RS-OUT2: JP5.2 R11.2 U3.4
RS-OUT3: JP7.2 R15.2 U4.4
RS-OUT4: JP9.2 R19.2 U5.4
RS-OUT5: JP11.2 R23.2 U6.4
RS-OUT6: JP13.2 R27.2 U7.4
RS-OUT7: JP15.2 R31.2 U8.4
RS-OUT8: JP17.2 R35.2 U9.4
RS-OUT9: JP19.2 R39.2 U10.4
RS-OUT10: JP21.2 R43.2 U11.4
RS-OUT11: JP23.2 R47.2 U12.4
RS-OUT12: JP25.2 R51.2 U13.4
RS-OUT13: JP27.2 R55.2 U14.4
RS-OUT14: JP29.2 R59.2 U15.4
RS-OUT15: JP31.2 R63.2 U16.4
RS-OUT16: JP33.2 R67.2 U17.4
RS-OUT17: JP35.2 R71.2 U18.4
RS-OUT18: JP37.2 R75.2 U19.4
RS-OUT19: JP39.2 R79.2 U20.4
RS-OUT20: JP41.2 R83.2 U21.4
RS-OUT21: JP43.2 R87.2 U22.4
RS-OUT22: JP45.2 R91.2 U23.4
RS-OUT23: JP47.2 R95.2 U24.4
RS-OUT24: JP49.2 R99.2 U25.4
RS-OUT25: JP51.2 R103.2 U26.4
RS-OUT26: JP53.2 R107.2 U27.4
RS-OUT27: JP55.2 R111.2 U28.4
RS-OUT28: JP57.2 R115.2 U29.4
RS-OUT29: JP59.2 R119.2 U30.4
RS-OUT30: JP61.2 R123.2 U31.4
RS-OUT31: JP63.2 R127.2 U32.4
RX: D4.C JP2.4 U2.2
RX1: D2.C JP4.4 U1.2
RX2: D7.C JP6.4 U3.2
RX3: D10.C JP8.4 U4.2
RX4: D13.C JP10.4 U5.2
RX5: D16.C JP12.4 U6.2
RX6: D19.C JP14.4 U7.2
RX7: D22.C JP16.4 U8.2
RX8: D25.C JP18.4 U9.2
RX9: D28.C JP20.4 U10.2
RX10: D31.C JP22.4 U11.2
RX11: D34.C JP24.4 U12.2
RX12: D37.C JP26.4 U13.2
RX13: D40.C JP28.4 U14.2
RX14: D43.C JP30.4 U15.2
RX15: D46.C JP32.4 U16.2
RX16: D49.C JP34.4 U17.2
RX17: D52.C JP36.4 U18.2
RX18: D55.C JP38.4 U19.2
RX19: D58.C JP40.4 U20.2
RX20: D61.C JP42.4 U21.2
RX21: D64.C JP44.4 U22.2
RX22: D67.C JP46.4 U23.2
RX23: D70.C JP48.4 U24.2
RX24: D73.C JP50.4 U25.2
RX25: D76.C JP52.4 U26.2
RX26: D79.C JP54.4 U27.2
RX27: D82.C JP56.4 U28.2
RX28: D85.C JP58.4 U29.2
RX29: D88.C JP60.4 U30.2
RX30: D91.C JP62.4 U31.2
RX31: D94.C JP64.4 U32.2
TX: D5.C JP2.3 R1.1 U2.1
TX1: D3.C JP4.3 R8.1 U1.1
TX2: D8.C JP6.3 R12.1 U3.1
TX3: D11.C JP8.3 R16.1 U4.1
TX4: D14.C JP10.3 R20.1 U5.1
TX5: D17.C JP12.3 R24.1 U6.1
TX6: D20.C JP14.3 R28.1 U7.1
TX7: D23.C JP16.3 R32.1 U8.1
TX8: D26.C JP18.3 R36.1 U9.1
TX9: D29.C JP20.3 R40.1 U10.1
TX10: D32.C JP22.3 R44.1 U11.1
TX11: D35.C JP24.3 R48.1 U12.1
TX12: D38.C JP26.3 R52.1 U13.1
TX13: D41.C JP28.3 R56.1 U14.1
TX14: D44.C JP30.3 R60.1 U15.1
TX15: D47.C JP32.3 R64.1 U16.1
TX16: D50.C JP34.3 R68.1 U17.1
TX17: D53.C JP36.3 R72.1 U18.1
TX18: D56.C JP38.3 R76.1 U19.1
TX19: D59.C JP40.3 R80.1 U20.1
TX20: D62.C JP42.3 R84.1 U21.1
TX21: D65.C JP44.3 R88.1 U22.1
TX22: D68.C JP46.3 R92.1 U23.1
TX23: D71.C JP48.3 R96.1 U24.1
TX24: D74.C JP50.3 R100.1 U25.1
TX25: D77.C JP52.3 R104.1 U26.1
TX26: D80.C JP54.3 R108.1 U27.1
TX27: D83.C JP56.3 R112.1 U28.1
TX28: D86.C JP58.3 R116.1 U29.1
TX29: D89.C JP60.3 R120.1 U30.1
TX30: D92.C JP62.3 R124.1 U31.1
TX31: D95.C JP64.3 R128.1 U32.1
VCC: JP2.1 R1.2 R3.2 R4.2 U2.3
VCC1: JP4.1 R5.2 R6.2 R8.2 U1.3
VCC2: JP6.1 R9.2 R10.2 R12.2 U3.3
VCC3: JP8.1 R13.2 R14.2 R16.2 U4.3
VCC4: JP10.1 R17.2 R18.2 R20.2 U5.3
VCC5: JP12.1 R21.2 R22.2 R24.2 U6.3
VCC6: JP14.1 R25.2 R26.2 R28.2 U7.3
VCC7: JP16.1 R29.2 R30.2 R32.2 U8.3
VCC8: JP18.1 R33.2 R34.2 R36.2 U9.3
VCC9: JP20.1 R37.2 R38.2 R40.2 U10.3
VCC10: JP22.1 R41.2 R42.2 R44.2 U11.3
VCC11: JP24.1 R45.2 R46.2 R48.2 U12.3
VCC12: JP26.1 R49.2 R50.2 R52.2 U13.3
VCC13: JP28.1 R53.2 R54.2 R56.2 U14.3
VCC14: JP30.1 R57.2 R58.2 R60.2 U15.3
VCC15: JP32.1 R61.2 R62.2 R64.2 U16.3
VCC16: JP34.1 R65.2 R66.2 R68.2 U17.3
VCC17: JP36.1 R69.2 R70.2 R72.2 U18.3
VCC18: JP38.1 R73.2 R74.2 R76.2 U19.3
VCC19: JP40.1 R77.2 R78.2 R80.2 U20.3
VCC20: JP42.1 R81.2 R82.2 R84.2 U21.3
VCC21: JP44.1 R85.2 R86.2 R88.2 U22.3
VCC22: JP46.1 R89.2 R90.2 R92.2 U23.3
VCC23: JP48.1 R93.2 R94.2 R96.2 U24.3
VCC24: JP50.1 R97.2 R98.2 R100.2 U25.3
VCC25: JP52.1 R101.2 R102.2 R104.2 U26.3
VCC26: JP54.1 R105.2 R106.2 R108.2 U27.3
VCC27: JP56.1 R109.2 R110.2 R112.2 U28.3
VCC28: JP58.1 R113.2 R114.2 R116.2 U29.3
VCC29: JP60.1 R117.2 R118.2 R120.2 U30.3
VCC30: JP62.1 R121.2 R122.2 R124.2 U31.3
VCC31: JP64.1 R125.2 R126.2 R128.2 U32.3

## Tracks (layer width: path | path; a pad name or v marks a point on that pad's centre or on a via)
GND
  Top 0.305: 29.21,32.26 C4.A 27.91,32.26 24.92,29.27 24.92,27.63 | 24.91,27.66 JP1.5 24.92,27.63 | U2.6 26.96,25.59 24.92,27.63
  pour Bottom (isolate 0.305): 13.97,37.34 36.83,37.34 36.83,6.86 13.97,6.86
  pour Top (isolate 0.305): 13.97,6.86 13.97,37.34 36.83,37.34 36.83,6.86
GND1
  Top 0.305: 59.69,32.26 C1.A 58.4,32.26 55.4,29.27 JP3.5 | 55.4,27.66 JP3.5 | U1.6 57.45,25.59 JP3.5
  pour Bottom (isolate 0.305): 44.45,37.34 67.31,37.34 67.31,6.86 44.45,6.86
  pour Top (isolate 0.305): 44.45,6.86 44.45,37.34 67.31,37.34 67.31,6.86
GND2
  Top 0.305: 90.17,32.26 C2.A 88.88,32.26 85.88,29.27 JP5.5 | 85.88,27.66 JP5.5 | U3.6 87.92,25.59 JP5.5
  pour Bottom (isolate 0.305): 74.93,37.34 97.79,37.34 97.79,6.86 74.93,6.86
  pour Top (isolate 0.305): 74.93,6.86 74.93,37.34 97.79,37.34 97.79,6.86
GND3
  Top 0.305: 120.65,32.26 C3.A 119.36,32.26 116.36,29.27 JP7.5 | 116.36,27.66 JP7.5 | U4.6 118.41,25.59 JP7.5
  pour Bottom (isolate 0.305): 105.41,37.34 128.27,37.34 128.27,6.86 105.41,6.86
  pour Top (isolate 0.305): 105.41,6.86 105.41,37.34 128.27,37.34 128.27,6.86
GND4
  Top 0.305: 29.21,67.06 C5.A 27.91,67.06 24.92,64.06 24.92,62.43 | 24.91,62.46 JP9.5 24.92,62.43 | U5.6 26.96,60.39 24.92,62.43
  pour Bottom (isolate 0.305): 13.97,72.14 36.83,72.14 36.83,41.66 13.97,41.66
  pour Top (isolate 0.305): 13.97,41.66 13.97,72.14 36.83,72.14 36.83,41.66
GND5
  Top 0.305: 59.69,67.06 C6.A 58.4,67.06 55.4,64.06 JP11.5 | 55.4,62.46 JP11.5 | U6.6 57.45,60.39 JP11.5
  pour Bottom (isolate 0.305): 44.45,72.14 67.31,72.14 67.31,41.66 44.45,41.66
  pour Top (isolate 0.305): 44.45,41.66 44.45,72.14 67.31,72.14 67.31,41.66
GND6
  Top 0.305: 90.17,67.06 C7.A 88.88,67.06 85.88,64.06 JP13.5 | 85.88,62.46 JP13.5 | U7.6 87.92,60.39 JP13.5
  pour Bottom (isolate 0.305): 74.93,72.14 97.79,72.14 97.79,41.66 74.93,41.66
  pour Top (isolate 0.305): 74.93,41.66 74.93,72.14 97.79,72.14 97.79,41.66
GND7
  Top 0.305: 120.65,67.06 C8.A 119.36,67.06 116.36,64.06 JP15.5 | 116.36,62.46 JP15.5 | U8.6 118.41,60.39 JP15.5
  pour Bottom (isolate 0.305): 105.41,72.14 128.27,72.14 128.27,41.66 105.41,41.66
  pour Top (isolate 0.305): 105.41,41.66 105.41,72.14 128.27,72.14 128.27,41.66
GND8
  Top 0.305: 29.21,101.85 C9.A 27.91,101.85 24.92,98.86 24.92,97.23 | 24.91,97.26 JP17.5 24.92,97.23 | U9.6 26.96,95.18 24.92,97.23
  pour Bottom (isolate 0.305): 13.97,106.93 36.83,106.93 36.83,76.45 13.97,76.45
  pour Top (isolate 0.305): 13.97,76.45 13.97,106.93 36.83,106.93 36.83,76.45
GND9
  Top 0.305: 59.69,101.85 C10.A 58.4,101.85 55.4,98.86 JP19.5 | 55.4,97.26 JP19.5 | U10.6 57.45,95.18 JP19.5
  pour Bottom (isolate 0.305): 44.45,106.93 67.31,106.93 67.31,76.45 44.45,76.45
  pour Top (isolate 0.305): 44.45,76.45 44.45,106.93 67.31,106.93 67.31,76.45
GND10
  Top 0.305: 90.17,101.85 C11.A 88.88,101.85 85.88,98.86 JP21.5 | 85.88,97.26 JP21.5 | U11.6 87.92,95.18 JP21.5
  pour Bottom (isolate 0.305): 74.93,106.93 97.79,106.93 97.79,76.45 74.93,76.45
  pour Top (isolate 0.305): 74.93,76.45 74.93,106.93 97.79,106.93 97.79,76.45
GND11
  Top 0.305: 120.65,101.85 C12.A 119.36,101.85 116.36,98.86 JP23.5 | 116.36,97.26 JP23.5 | U12.6 118.41,95.18 JP23.5
  pour Bottom (isolate 0.305): 105.41,106.93 128.27,106.93 128.27,76.45 105.41,76.45
  pour Top (isolate 0.305): 105.41,76.45 105.41,106.93 128.27,106.93 128.27,76.45
GND12
  Top 0.305: 29.21,136.65 C13.A 27.91,136.65 24.92,133.66 24.92,132.03 | 24.91,132.06 JP25.5 24.92,132.03 | U13.6 26.96,129.98 24.92,132.03
  pour Bottom (isolate 0.305): 13.97,141.73 36.83,141.73 36.83,111.25 13.97,111.25
  pour Top (isolate 0.305): 13.97,111.25 13.97,141.73 36.83,141.73 36.83,111.25
GND13
  Top 0.305: 59.69,136.65 C14.A 58.4,136.65 55.4,133.66 JP27.5 | 55.4,132.06 JP27.5 | U14.6 57.45,129.98 JP27.5
  pour Bottom (isolate 0.305): 44.45,141.73 67.31,141.73 67.31,111.25 44.45,111.25
  pour Top (isolate 0.305): 44.45,111.25 44.45,141.73 67.31,141.73 67.31,111.25
GND14
  Top 0.305: 90.17,136.65 C15.A 88.88,136.65 85.88,133.66 JP29.5 | 85.88,132.06 JP29.5 | U15.6 87.92,129.98 JP29.5
  pour Bottom (isolate 0.305): 74.93,141.73 97.79,141.73 97.79,111.25 74.93,111.25
  pour Top (isolate 0.305): 74.93,111.25 74.93,141.73 97.79,141.73 97.79,111.25
GND15
  Top 0.305: 120.65,136.65 C16.A 119.36,136.65 116.36,133.66 JP31.5 | 116.36,132.06 JP31.5 | U16.6 118.41,129.98 JP31.5
  pour Bottom (isolate 0.305): 105.41,141.73 128.27,141.73 128.27,111.25 105.41,111.25
  pour Top (isolate 0.305): 105.41,111.25 105.41,141.73 128.27,141.73 128.27,111.25
GND16
  Top 0.305: 164.85,32.26 C17.A 163.55,32.26 160.56,29.27 JP33.5 | 160.55,27.66 JP33.5 | U17.6 162.6,25.59 JP33.5
  pour Bottom (isolate 0.305): 149.61,37.34 172.47,37.34 172.47,6.86 149.61,6.86
  pour Top (isolate 0.305): 149.61,6.86 149.61,37.34 172.47,37.34 172.47,6.86
GND17
  Top 0.305: 195.33,32.26 C18.A 194.03,32.26 191.04,29.27 JP35.5 | 191.03,27.66 JP35.5 | U18.6 193.08,25.59 JP35.5
  pour Bottom (isolate 0.305): 180.09,37.34 202.95,37.34 202.95,6.86 180.09,6.86
  pour Top (isolate 0.305): 180.09,6.86 180.09,37.34 202.95,37.34 202.95,6.86
GND18
  Top 0.305: 225.81,32.26 C19.A 224.51,32.26 221.52,29.27 JP37.5 | 221.51,27.66 JP37.5 | U19.6 223.56,25.59 JP37.5
  pour Bottom (isolate 0.305): 210.57,37.34 233.43,37.34 233.43,6.86 210.57,6.86
  pour Top (isolate 0.305): 210.57,6.86 210.57,37.34 233.43,37.34 233.43,6.86
GND19
  Top 0.305: 256.29,32.26 C20.A 254.99,32.26 252,29.27 JP39.5 | 251.99,27.66 JP39.5 | U20.6 254.04,25.59 JP39.5
  pour Bottom (isolate 0.305): 241.05,37.34 263.91,37.34 263.91,6.86 241.05,6.86
  pour Top (isolate 0.305): 241.05,6.86 241.05,37.34 263.91,37.34 263.91,6.86
GND20
  Top 0.305: 164.85,67.06 C21.A 163.55,67.06 160.56,64.06 JP41.5 | 160.55,62.46 JP41.5 | U21.6 162.6,60.39 JP41.5
  pour Bottom (isolate 0.305): 149.61,72.14 172.47,72.14 172.47,41.66 149.61,41.66
  pour Top (isolate 0.305): 149.61,41.66 149.61,72.14 172.47,72.14 172.47,41.66
GND21
  Top 0.305: 195.33,67.06 C22.A 194.03,67.06 191.04,64.06 JP43.5 | 191.03,62.46 JP43.5 | U22.6 193.08,60.39 JP43.5
  pour Bottom (isolate 0.305): 180.09,72.14 202.95,72.14 202.95,41.66 180.09,41.66
  pour Top (isolate 0.305): 180.09,41.66 180.09,72.14 202.95,72.14 202.95,41.66
GND22
  Top 0.305: 225.81,67.06 C23.A 224.51,67.06 221.52,64.06 JP45.5 | 221.51,62.46 JP45.5 | U23.6 223.56,60.39 JP45.5
  pour Bottom (isolate 0.305): 210.57,72.14 233.43,72.14 233.43,41.66 210.57,41.66
  pour Top (isolate 0.305): 210.57,41.66 210.57,72.14 233.43,72.14 233.43,41.66
GND23
  Top 0.305: 256.29,67.06 C24.A 254.99,67.06 252,64.06 JP47.5 | 251.99,62.46 JP47.5 | U24.6 254.04,60.39 JP47.5
  pour Bottom (isolate 0.305): 241.05,72.14 263.91,72.14 263.91,41.66 241.05,41.66
  pour Top (isolate 0.305): 241.05,41.66 241.05,72.14 263.91,72.14 263.91,41.66
GND24
  Top 0.305: 164.85,101.85 C25.A 163.55,101.85 160.56,98.86 JP49.5 | 160.55,97.26 JP49.5 | U25.6 162.6,95.18 JP49.5
  pour Bottom (isolate 0.305): 149.61,106.93 172.47,106.93 172.47,76.45 149.61,76.45
  pour Top (isolate 0.305): 149.61,76.45 149.61,106.93 172.47,106.93 172.47,76.45
GND25
  Top 0.305: 195.33,101.85 C26.A 194.03,101.85 191.04,98.86 JP51.5 | 191.03,97.26 JP51.5 | U26.6 193.08,95.18 JP51.5
  pour Bottom (isolate 0.305): 180.09,106.93 202.95,106.93 202.95,76.45 180.09,76.45
  pour Top (isolate 0.305): 180.09,76.45 180.09,106.93 202.95,106.93 202.95,76.45
GND26
  Top 0.305: 225.81,101.85 C27.A 224.51,101.85 221.52,98.86 JP53.5 | 221.51,97.26 JP53.5 | U27.6 223.56,95.18 JP53.5
  pour Bottom (isolate 0.305): 210.57,106.93 233.43,106.93 233.43,76.45 210.57,76.45
  pour Top (isolate 0.305): 210.57,76.45 210.57,106.93 233.43,106.93 233.43,76.45
GND27
  Top 0.305: 256.29,101.85 C28.A 254.99,101.85 252,98.86 JP55.5 | 251.99,97.26 JP55.5 | U28.6 254.04,95.18 JP55.5
  pour Bottom (isolate 0.305): 241.05,106.93 263.91,106.93 263.91,76.45 241.05,76.45
  pour Top (isolate 0.305): 241.05,76.45 241.05,106.93 263.91,106.93 263.91,76.45
GND28
  Top 0.305: 164.85,136.65 C29.A 163.55,136.65 160.56,133.66 JP57.5 | 160.55,132.06 JP57.5 | U29.6 162.6,129.98 JP57.5
  pour Bottom (isolate 0.305): 149.61,141.73 172.47,141.73 172.47,111.25 149.61,111.25
  pour Top (isolate 0.305): 149.61,111.25 149.61,141.73 172.47,141.73 172.47,111.25
GND29
  Top 0.305: 195.33,136.65 C30.A 194.03,136.65 191.04,133.66 JP59.5 | 191.03,132.06 JP59.5 | U30.6 193.08,129.98 JP59.5
  pour Bottom (isolate 0.305): 180.09,141.73 202.95,141.73 202.95,111.25 180.09,111.25
  pour Top (isolate 0.305): 180.09,111.25 180.09,141.73 202.95,141.73 202.95,111.25
GND30
  Top 0.305: 225.81,136.65 C31.A 224.51,136.65 221.52,133.66 JP61.5 | 221.51,132.06 JP61.5 | U31.6 223.56,129.98 JP61.5
  pour Bottom (isolate 0.305): 210.57,141.73 233.43,141.73 233.43,111.25 210.57,111.25
  pour Top (isolate 0.305): 210.57,111.25 210.57,141.73 233.43,141.73 233.43,111.25
GND31
  Top 0.305: 256.29,136.65 C32.A 254.99,136.65 252,133.66 JP63.5 | 251.99,132.06 JP63.5 | U32.6 254.04,129.98 JP63.5
  pour Bottom (isolate 0.305): 241.05,141.73 263.91,141.73 263.91,111.25 241.05,111.25
  pour Top (isolate 0.305): 241.05,111.25 241.05,141.73 263.91,141.73 263.91,111.25
N$1
  Top 0.254: 30.23,19.53 D4.A
  Top 0.305: D4.A 30.48,19.56 | R3.1 27.94,18.03 28.19,17.78 29.59,17.78 30.23,18.41 30.23,19.53
N$2
  Top 0.254: 28.03,36.2 R4.1
  Top 0.305: D5.A 29.46,35.43 28.7,36.2 28.03,36.2
N$3
  Top 0.254: 60.71,19.53 D2.A
  Top 0.305: D2.A 60.96,19.56 | R5.1 58.42,18.03 58.67,17.78 60.07,17.78 60.71,18.41 60.71,19.53
N$4
  Top 0.305: 31.75,32.26 C4.C 31.88,31.16 31.62,30.9 D1.A | D1.A 31.75,29.84 | 31.75,29.72 D1.A | R2.1 31.63,27.97 D1.A
N$5
  Top 0.254: 58.51,36.2 R6.1
  Top 0.305: D3.A 59.94,35.43 59.18,36.2 58.51,36.2
N$6
  Top 0.305: 62.23,32.26 C1.C 62.36,31.16 62.1,30.9 D6.A | D6.A 62.23,29.84 | 62.23,29.72 D6.A | R7.1 62.11,27.97 D6.A
N$7
  Top 0.254: 91.19,19.53 D7.A
  Top 0.305: D7.A 91.44,19.56 | R9.1 88.9,18.03 89.15,17.78 90.55,17.78 91.19,18.41 91.19,19.53
N$8
  Top 0.254: 88.99,36.2 R10.1
  Top 0.305: D8.A 90.42,35.43 89.66,36.2 88.99,36.2
N$9
  Top 0.305: 92.71,32.26 C2.C 92.84,31.16 92.58,30.9 D9.A | D9.A 92.71,29.84 | 92.71,29.72 D9.A | R11.1 92.59,27.97 D9.A
N$10
  Top 0.254: 121.67,19.53 D10.A
  Top 0.305: D10.A 121.92,19.56 | R13.1 119.38,18.03 119.63,17.78 121.03,17.78 121.67,18.41 121.67,19.53
N$11
  Top 0.254: 119.47,36.2 R14.1
  Top 0.305: D11.A 120.9,35.43 120.14,36.2 119.47,36.2
N$12
  Top 0.305: 123.19,32.26 C3.C 123.32,31.16 123.06,30.9 D12.A | D12.A 123.19,29.84 | 123.19,29.72 D12.A | R15.1 123.07,27.97 D12.A
N$13
  Top 0.254: 30.23,54.33 D13.A
  Top 0.305: D13.A 30.48,54.36 | R17.1 27.94,52.83 28.19,52.58 29.59,52.58 30.23,53.21 30.23,54.33
N$14
  Top 0.254: 28.03,70.99 R18.1
  Top 0.305: D14.A 29.46,70.23 28.7,70.99 28.03,70.99
N$15
  Top 0.305: 31.75,67.06 C5.C 31.88,65.95 31.62,65.69 D15.A | D15.A 31.75,64.64 | 31.75,64.52 D15.A | R19.1 31.63,62.77 D15.A
N$16
  Top 0.254: 60.71,54.33 D16.A
  Top 0.305: D16.A 60.96,54.36 | R21.1 58.42,52.83 58.67,52.58 60.07,52.58 60.71,53.21 60.71,54.33
N$17
  Top 0.254: 58.51,70.99 R22.1
  Top 0.305: D17.A 59.94,70.23 59.18,70.99 58.51,70.99
N$18
  Top 0.305: 62.23,67.06 C6.C 62.36,65.95 62.1,65.69 D18.A | D18.A 62.23,64.64 | 62.23,64.52 D18.A | R23.1 62.11,62.77 D18.A
N$19
  Top 0.254: 91.19,54.33 D19.A
  Top 0.305: D19.A 91.44,54.36 | R25.1 88.9,52.83 89.15,52.58 90.55,52.58 91.19,53.21 91.19,54.33
N$20
  Top 0.254: 88.99,70.99 R26.1
  Top 0.305: D20.A 90.42,70.23 89.66,70.99 88.99,70.99
N$21
  Top 0.305: 92.71,67.06 C7.C 92.84,65.95 92.58,65.69 D21.A | D21.A 92.71,64.64 | 92.71,64.52 D21.A | R27.1 92.59,62.77 D21.A
N$22
  Top 0.254: 121.67,54.33 D22.A
  Top 0.305: D22.A 121.92,54.36 | R29.1 119.38,52.83 119.63,52.58 121.03,52.58 121.67,53.21 121.67,54.33
N$23
  Top 0.254: 119.47,70.99 R30.1
  Top 0.305: D23.A 120.9,70.23 120.14,70.99 119.47,70.99
N$24
  Top 0.305: 123.19,67.06 C8.C 123.32,65.95 123.06,65.69 D24.A | D24.A 123.19,64.64 | 123.19,64.52 D24.A | R31.1 123.07,62.77 D24.A
N$25
  Top 0.254: 30.23,89.13 D25.A
  Top 0.305: D25.A 30.48,89.15 | R33.1 27.94,87.63 28.19,87.38 29.59,87.38 30.23,88.01 30.23,89.13
N$26
  Top 0.254: 28.03,105.79 R34.1
  Top 0.305: D26.A 29.46,105.03 28.7,105.79 28.03,105.79
N$27
  Top 0.305: 31.75,101.85 C9.C 31.88,100.75 31.62,100.49 31.62,99.32 D27.A | D27.A 31.75,99.43 | 31.75,99.31 D27.A | R35.1 31.63,97.57 D27.A
N$28
  Top 0.254: 60.71,89.13 D28.A
  Top 0.305: D28.A 60.96,89.15 | R37.1 58.42,87.63 58.67,87.38 60.07,87.38 60.71,88.01 60.71,89.13
N$29
  Top 0.254: 58.51,105.79 R38.1
  Top 0.305: D29.A 59.94,105.03 59.18,105.79 58.51,105.79
N$30
  Top 0.305: 62.23,101.85 C10.C 62.36,100.75 62.1,100.49 62.1,99.32 D30.A | D30.A 62.23,99.43 | 62.23,99.31 D30.A | R39.1 62.11,97.57 D30.A
N$31
  Top 0.254: 91.19,89.13 D31.A
  Top 0.305: D31.A 91.44,89.15 | R41.1 88.9,87.63 89.15,87.38 90.55,87.38 91.19,88.01 91.19,89.13
N$32
  Top 0.254: 88.99,105.79 R42.1
  Top 0.305: D32.A 90.42,105.03 89.66,105.79 88.99,105.79
N$33
  Top 0.305: 92.71,101.85 C11.C 92.84,100.75 92.58,100.49 92.58,99.32 D33.A | D33.A 92.71,99.43 | 92.71,99.31 D33.A | R43.1 92.59,97.57 D33.A
N$34
  Top 0.254: 121.67,89.13 D34.A
  Top 0.305: D34.A 121.92,89.15 | R45.1 119.38,87.63 119.63,87.38 121.03,87.38 121.67,88.01 121.67,89.13
N$35
  Top 0.254: 119.47,105.79 R46.1
  Top 0.305: D35.A 120.9,105.03 120.14,105.79 119.47,105.79
N$36
  Top 0.305: 123.19,101.85 C12.C 123.32,100.75 123.06,100.49 123.06,99.32 D36.A | D36.A 123.19,99.43 | 123.19,99.31 D36.A | R47.1 123.07,97.57 D36.A
N$37
  Top 0.254: 30.23,123.93 D37.A
  Top 0.305: D37.A 30.48,123.95 | R49.1 27.94,122.43 28.19,122.17 29.59,122.17 30.23,122.81 30.23,123.93
N$38
  Top 0.254: 28.03,140.59 R50.1
  Top 0.305: D38.A 29.46,139.83 28.7,140.59 28.03,140.59
N$39
  Top 0.305: 31.75,136.65 C13.C 31.88,135.55 31.62,135.29 31.62,134.12 D39.A | D39.A 31.75,134.23 | 31.75,134.11 D39.A | R51.1 31.63,132.36 D39.A
N$40
  Top 0.254: 60.71,123.93 D40.A
  Top 0.305: D40.A 60.96,123.95 | R53.1 58.42,122.43 58.67,122.17 60.07,122.17 60.71,122.81 60.71,123.93
N$41
  Top 0.254: 58.51,140.59 R54.1
  Top 0.305: D41.A 59.94,139.83 59.18,140.59 58.51,140.59
N$42
  Top 0.305: 62.23,136.65 C14.C 62.36,135.55 62.1,135.29 62.1,134.12 D42.A | D42.A 62.23,134.23 | 62.23,134.11 D42.A | R55.1 62.11,132.36 D42.A
N$43
  Top 0.254: 91.19,123.93 D43.A
  Top 0.305: D43.A 91.44,123.95 | R57.1 88.9,122.43 89.15,122.17 90.55,122.17 91.19,122.81 91.19,123.93
N$44
  Top 0.254: 88.99,140.59 R58.1
  Top 0.305: D44.A 90.42,139.83 89.66,140.59 88.99,140.59
N$45
  Top 0.305: 92.71,136.65 C15.C 92.84,135.55 92.58,135.29 92.58,134.12 D45.A | D45.A 92.71,134.23 | 92.71,134.11 D45.A | R59.1 92.59,132.36 D45.A
N$46
  Top 0.254: 121.67,123.93 D46.A
  Top 0.305: D46.A 121.92,123.95 | R61.1 119.38,122.43 119.63,122.17 121.03,122.17 121.67,122.81 121.67,123.93
N$47
  Top 0.254: 119.47,140.59 R62.1
  Top 0.305: D47.A 120.9,139.83 120.14,140.59 119.47,140.59
N$48
  Top 0.305: 123.19,136.65 C16.C 123.32,135.55 123.06,135.29 123.06,134.12 D48.A | D48.A 123.19,134.23 | 123.19,134.11 D48.A | R63.1 123.07,132.36 D48.A
N$49
  Top 0.254: 165.86,19.53 D49.A
  Top 0.305: D49.A 166.12,19.56 | R65.1 163.58,18.03 163.83,17.78 165.23,17.78 165.86,18.41 165.86,19.53
N$50
  Top 0.254: 163.66,36.2 R66.1
  Top 0.305: D50.A 165.1,35.43 164.34,36.2 163.66,36.2
N$51
  Top 0.305: 167.39,32.26 C17.C 167.52,31.16 167.26,30.9 167.26,29.73 D51.A | D51.A 167.39,29.84 | 167.39,29.72 D51.A | R67.1 167.27,27.97 D51.A
N$52
  Top 0.254: 196.34,19.53 D52.A
  Top 0.305: D52.A 196.6,19.56 | R69.1 194.06,18.03 194.31,17.78 195.71,17.78 196.34,18.41 196.34,19.53
N$53
  Top 0.254: 194.14,36.2 R70.1
  Top 0.305: D53.A 195.58,35.43 194.82,36.2 194.14,36.2
N$54
  Top 0.305: 197.87,32.26 C18.C 198,31.16 197.74,30.9 197.74,29.73 D54.A | D54.A 197.87,29.84 | 197.87,29.72 D54.A | R71.1 197.75,27.97 D54.A
N$55
  Top 0.254: 226.82,19.53 D55.A
  Top 0.305: D55.A 227.08,19.56 | R73.1 224.54,18.03 224.79,17.78 226.19,17.78 226.82,18.41 226.82,19.53
N$56
  Top 0.254: 224.62,36.2 R74.1
  Top 0.305: D56.A 226.06,35.43 225.3,36.2 224.62,36.2
N$57